# Altium PCB Power_Board.PcbDoc (part 2 of 3)
Units mil, origin at the board's own origin, x right, y up, seen from the top; angles counter-clockwise.
Board outline 5980 x 2140 mil, 4 copper layers (Top Layer, Layer 1, Layer 2, Bottom Layer), stack 23.756 mil thick; 228 components, 110 nets, 609 pads, 397 vias.
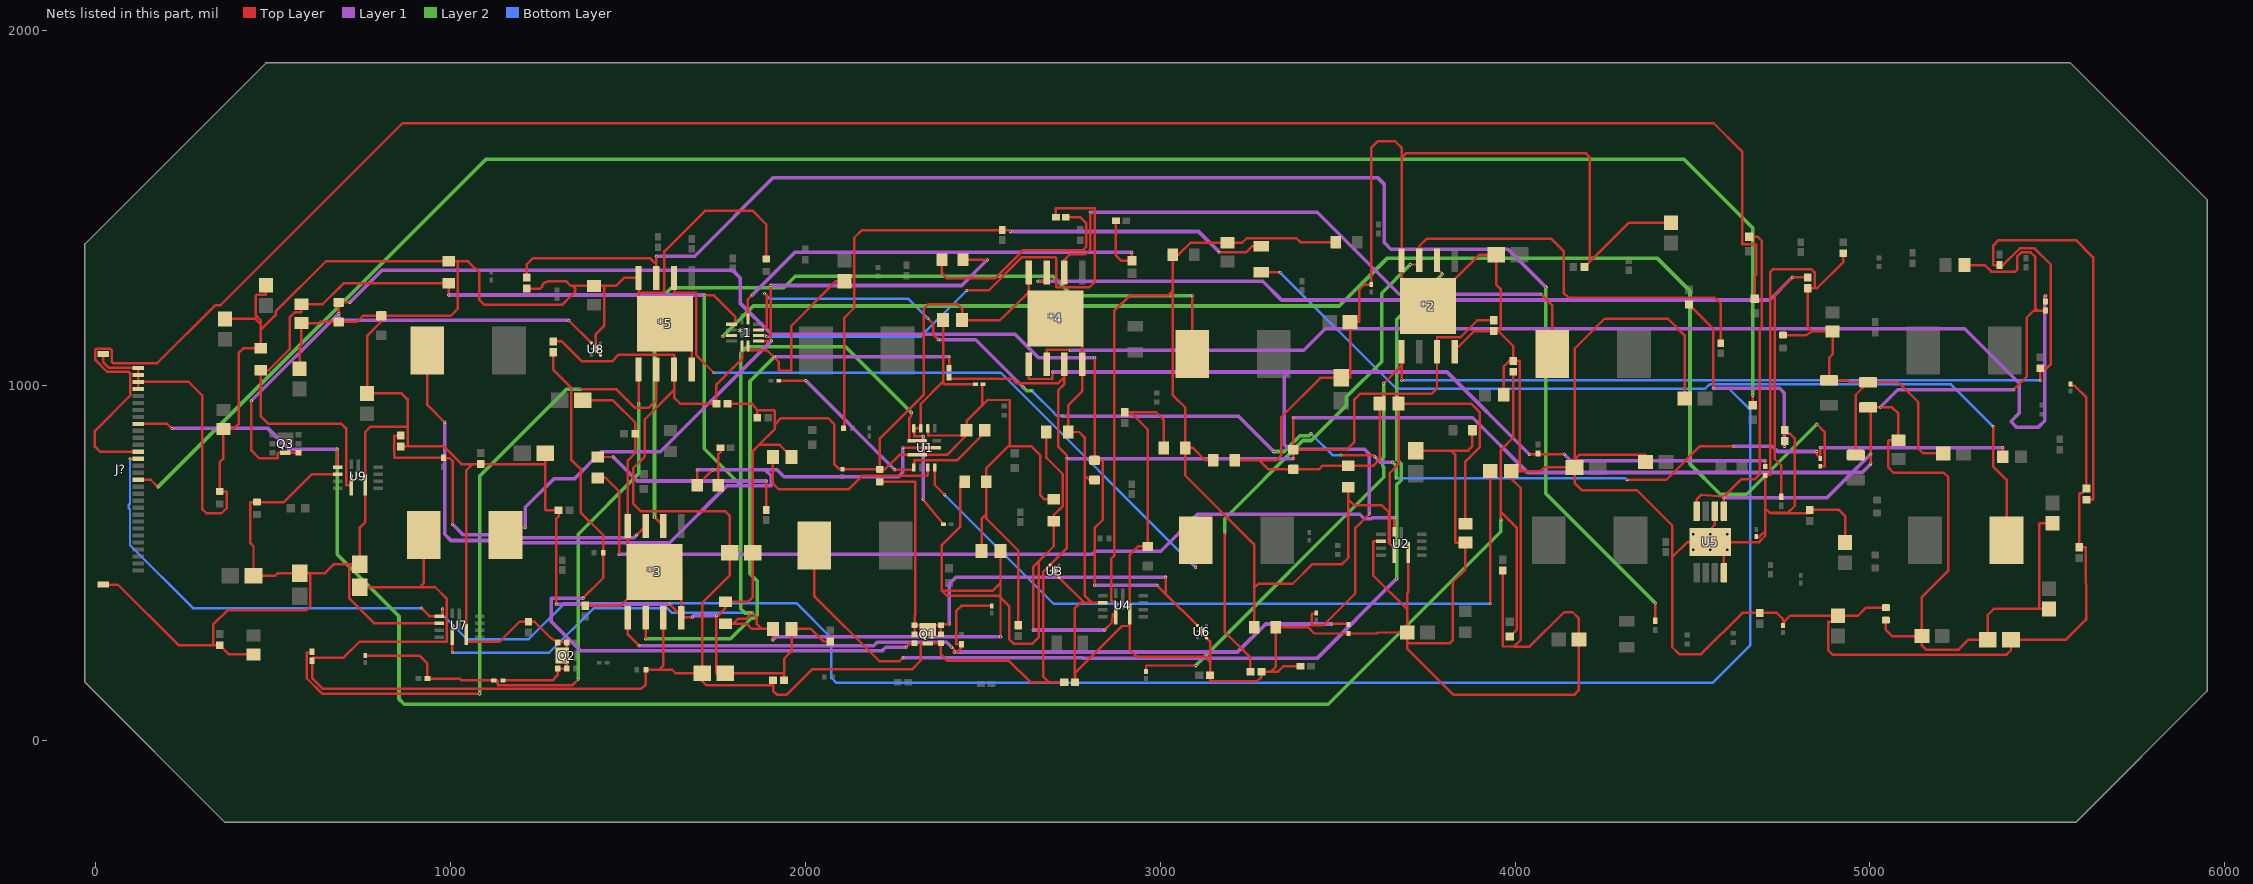
[diagram p4: the nets of this part, all layers, seen from the top]

## Part data (continued)
Q1 Q2 Q3: library part CMP-029-000000-1, "P-Channel 30V 10A (Ta) 1.25W (Ta) Surface Mount 6-UDFNB (2x2)", Package=None, Availability=Unavailable, Component Type=Standard, Design Item ID=SSM6J507NU,LF(T, MP=SSM6J507NU,LF(T, Pin Count=8, Price=None, Source=SSM6J507NU,LF(T.SchLib
R1: library part CMP-26527-001323-1, "4.7kΩ ±5% 0.05W 0201 Thick Film Chip Resistor AEC-Q200 compliant", Case Code (Imperial)=0201, Case Code (Metric)=0603, Max Operating Temperature=125°C, Max Power Dissipation=50mW, Min Operating Temperature=-55°C, Package Quantity=1, Resistance=4.7kR, Resistor Type="Thick Film", Temperature Coefficient=200ppm/°C, Tolerance=5%, Case/Package=0201, Contact Plating=Tin, Height=0.009inch, Lead Free="Lead Free", Length=0.024inch, Mount="Surface Mount", Number of Terminations=2, Packaging="Tape and Reel", Radiation Hardening=No, RoHS Compliant=Yes, Series=RMCF, Width=0.012inch
R2 R3 R10: library part CMP-2004-03564-1, Manufacturer="TE Connectivity / AMP", Part Number=CRG0201F100K
R4 R9 R14 R33 R51 R69: library part CMP-26527-006332-1, "3.3Ω ±5% 0.05W 0201 Thick Film Chip Resistor AEC-Q200 compliant", Case/Package=0201, Max Operating Temperature=125°C, Max Power Dissipation=50mW, Min Operating Temperature=-55°C, Resistance=3.3R, Resistor Type="Thick Film", Temperature Coefficient=400ppm/°C, Tolerance=5%, Contact Plating=Tin, Height=0.009inch, Length=0.024inch, Mount="Surface Mount", Number of Terminations=2, Packaging="Tape and Reel", Radiation Hardening=No, RoHS Compliant=Yes, Series=RMCF, Width=0.012inch
R5: library part CMP-26527-004787-1, "47kΩ ±5% 0.05W 0201 Thick Film Chip Resistor AEC-Q200 compliant", Case Code (Imperial)=0201, Case Code (Metric)=0603, Max Operating Temperature=125°C, Max Power Dissipation=50mW, Min Operating Temperature=-55°C, Package Quantity=10000, Resistance=47kR, Resistor Type="Thick Film", Temperature Coefficient=200ppm/°C, Tolerance=5%, Case/Package=0201, Contact Plating=Tin, Height=0.009inch, Length=0.024inch, Mount="Surface Mount", Number of Terminations=2, Packaging="Tape and Reel", Power Rating=50mW, Radiation Hardening=No, RoHS Compliant=Yes, Series=RMCF, Width=0.012inch
R6: library part CMP-03412-006200-1, "RT0201 10KΩ 0.05W 50 ppm/°C 0.10%", Manufacturer=Yageo, Package=RT0201, Power Rating=0.05W, Resistance=10KΩ, Temperature="-55°C to +125°C", Temperature Coefficient="50 ppm/°C", Temperature Range High=+125°C, Temperature Range Low=-55°C, Tolerance=0.001, Voltage Rating=25V, Automotive=No, Category=Res, ComponentLink2Description=Datasheet, ComponentLink2URL=http://www.yageo.com/documents/recent/PYu-RT_1-to-0.01_RoHS_L_9.pdf, Composition="Thin Film", Device Class L1="Passive Components", Device Class L2=Resistors, Device Class L3="Chip SMD Resistors", Footprint Url=http://www.yageo.com/exep/pages/download/literatures/PYu-R_Mount_10.pdf, Height=0.26mm, Ipc Land Pattern Name=RESC6030X23, Lead Free=Yes, Manufacturer Part Number=RT0201BRE0710KL, Octopart=https://octopart.com/rt0201bre0710kl-yageo-87214258, RoHS=TRUE, Series=RT
R7: library part CMP-2004-03891-1, Manufacturer="TE Connectivity / AMP", Part Number=CPF0201D1K0E1
R8: library part CMP-2004-02508-1, Manufacturer=Multicomp, Part Number=MCRE000140
R11 R13 R30 R32 R46 R47 R48 R50 R66 R68: library part CMP-2002-00308-2, "RES Thick Film, 1.21Ω, 1%, 0.063W, 100ppm/°C, 0402", Case Code (Imperial)=0402, Case Code (Metric)=1005, Max Operating Temperature=155°C, Max Power Dissipation=63mW, Min Operating Temperature=-55°C, Package Quantity=10, Resistance=1.21R, Temperature Coefficient=100ppm/°C, Tolerance=1%, Voltage Rating=50V, Case/Package=0402, Composition="Thick Film", Contact Plating=Tin, Features="Automotive AEC-Q200", Height=0.016inch, Lead Free="Lead Free", Length=0.039inch, Number of Terminations=2, Packaging="Tape and Reel", Power Rating=63mW, Radiation Hardening=No, Termination=SMD/SMT, Weight=2.3E-05oz, Width=0.5mm
R12 R31 R49 R67: library part CMP-26527-005560-1, "5.6kΩ ±5% 0.05W 0201 Thick Film Chip Resistor AEC-Q200 compliant", Case Code (Imperial)=0201, Case Code (Metric)=0603, Max Operating Temperature=125°C, Max Power Dissipation=50mW, Min Operating Temperature=-55°C, Resistance=5.6kR, Resistor Type="Thick Film", Temperature Coefficient=200ppm/°C, Tolerance=5%, Case/Package=0201, Contact Plating=Tin, Height=0.009inch, Length=0.024inch, Mount="Surface Mount", Number of Terminations=2, Packaging="Tape and Reel", Radiation Hardening=No, RoHS Compliant=Yes, Series=RMCF, Width=0.012inch
R15 R34 R52 R70: library part CMP-2004-00692-1, Manufacturer="Vishay Dale", Part Number=CRCW020151K0FNED
R16 R35 R53 R65 R71: library part CMP-009-00210-1, "Fixed Resistor, Thin Film, 0.05W, 10000ohm, 25V, 0.1% +/-Tol, 50ppm/Cel, Surface Mount, 0201", Case/Package=0201, Max Operating Temperature=125°C, Min Operating Temperature=-55°C, Tolerance=0.1%, Voltage Rating=25V, Mounting Technology="Surface Mount"
R17 R36 R54 R72: library part CMP-03412-049532-1, "Anti-Sulfurated Chip Resistors Automotive Grade 499kΩ 1% 200ppm/°C 0201", Case/Package=0201, Max Operating Temperature=125°C, Max Power Dissipation=50mW, Min Operating Temperature=-55°C, Resistance=499kR, Resistor Type="Thick Film", Temperature Coefficient=200ppm/°C, Tolerance=1%, Features="Moisture Resistant", Height=0.01inch, Length=0.024inch, Number of Terminations=2, Packaging="Tape and Reel", RoHS Compliant=Yes, Series=AF, Width=0.012inch
R18 R37 R55 R73: library part CMP-2004-00746-1, Manufacturer="Vishay Dale", Part Number=CRCW02015K60JNED
R19 R38 R56 R74: library part CMP-2004-00695-1, Manufacturer="Vishay Dale", Part Number=CRCW020151K1FNED
R20 R39 R57 R75: library part CMP-03412-047469-1, "Anti-Sulfurated Chip Resistors Automotive Grade 499Ω 1% 200ppm/°C 0201", Case/Package=0201, Max Operating Temperature=125°C, Max Power Dissipation=50mW, Min Operating Temperature=-55°C, Resistance=499R, Resistor Type="Thick Film", Temperature Coefficient=200ppm/°C, Tolerance=1%, Features="Moisture Resistant", Height=0.01inch, Length=0.024inch, Number of Terminations=2, Packaging="Tape and Reel", RoHS Compliant=Yes, Series=AF, Width=0.012inch
R21 R40 R58 R76: library part CMP-1010-00694-1, "300K 0.05W 1% 0201 (0603 Metric)  SMD", Case-EIA=0201, Case-Metric=0603, Power="0.05 W", Tolerance="1 %", Technology=SMT
R22 R41 R59 R77: library part CMP-2004-00140-1, Manufacturer="Vishay Dale", Part Number=CRCW0201160KFNED
R23 R42 R60 R78: library part CMP-1010-00656-1, "137K 0.05W 1% 0201 (0603 Metric)  SMD", Case-EIA=0201, Case-Metric=0603, Power="0.05 W", Tolerance="1 %", Technology=SMT
R24: library part CMP-009-00217-1, "CRCW FIXED RESISTOR 0201 (0603Metric) Chip Resistor ±1% ±100ppm/C 137kOhm 0.05W 1/20W", Case/Package=0201, Max Operating Temperature=155°C, Min Operating Temperature=-55°C, Tolerance=1%, Voltage Rating=30V, Mounting Technology="Surface Mount"
R25: library part CMP-009-00221-1, "50mW Thick Film Resistors 25V ±1% ±200ppm/℃ 300kΩ 0201 Chip Resistor - Surface Mount ROHS", Case/Package=0201, Max Operating Temperature=125°C, Min Operating Temperature=-55°C, Tolerance=1%, Voltage Rating=25V, Mounting Technology="Surface Mount"
R26 R43: library part CMP-009-00222-1, "CRCW Series 0201 160 kOhm ±1% 0.05 W ±200 ppm/K Thick Film Chip Resistor", Case/Package=0201, Max Operating Temperature=155°C, Min Operating Temperature=-55°C, Tolerance=1%, Voltage Rating=30V, Mounting Technology="Surface Mount"
R27: library part CMP-009-00224-1, "0201 51.1K ohms 1% 200PPM thick film surface mount chip resistor", Case/Package=0201, Max Operating Temperature=155°C, Min Operating Temperature=-55°C, Tolerance=1%, Voltage Rating=30V, Mounting Technology="Surface Mount"
R28 R29 R45: library part CMP-009-00207-1, "Res Thick Film 0201 4.7K Ohm 5% 0.05W(1/20W) ±200ppm/C Pad SMD Automotive T/R", Case/Package=0201, Max Operating Temperature=155°C, Min Operating Temperature=-55°C, Tolerance=5%, Voltage Rating=25V, Mounting Technology="Surface Mount"
R44: library part CMP-009-00163-3, "Chip Resistor, 200 kOhms, +/-1 %, 63 mW, -55 to 155 degC, 0402", Case/Package=0402, Max Operating Temperature=155°C, Min Operating Temperature=-55°C, Power=63mW, Tolerance=1%, Pins=2
R61 R79 R83: library part CMP-13261-004037-1, "Res Thick Film 0201 120kΩ 1% 0.05W ±250ppm/°C Molded SMD T/R", Case Code (Imperial)=0201, Case Code (Metric)=0603, Max Operating Temperature=125°C, Max Power Dissipation=50mW, Min Operating Temperature=-55°C, Resistance=120kR, Temperature Coefficient=250ppm/°C, Tolerance=1%, Voltage Rating (DC)=25V, Case/Package=0201, Composition="Thick Film", Contact Plating=Tin, Features="Moisture Resistant", Height=0.01inch, Lead Free="Lead Free", Length=0.024inch, Number of Terminations=2, Packaging="Tape and Reel", Radiation Hardening=No, Width=0.012inch
R62 R63 R80 R81 R84 R85: library part CMP-009-00205-1, "Res General Purpose Thick Film 0201 100k Ohm 1% 1/20W ±200ppm/°C Molded Paper T/R", Case/Package=0201, Max Operating Temperature=155°C, Min Operating Temperature=-55°C, Tolerance=1%, Voltage Rating=25V, Mounting Technology="Surface Mount"
R64 R82 R86: library part CMP-009-00208-1, "Res General Purpose Thick Film 0201 1k Ohm 1% 1/20W ±200ppm/°C Molded Paper T/R", Case/Package=0201, Max Operating Temperature=125°C, Min Operating Temperature=-55°C, Tolerance=1%, Voltage Rating=25V
U1: library part CMP-019-00053-1, "Step-Down (Buck) Synchronous (1), Linear (LDO) (1) QFN-12", Max Operating Temperature=125°C, Max Supply Voltage=24V, Min Operating Temperature=-40°C
U2 U4 U7 U9: library part CMP-006-000002-1, "26V 6A Low IQ High-Current Synchronous Step-Down Converter", Manufacturer_Name="Monolithic Power Systems", Copyright="Copyright (C) 2025 Ultra Librarian. All rights reserved.", Design Item ID=MP8756GD-Z, Manufacturer_Part_Number=MP8756GD-Z, RefDes=RefDes, Source=MP8756GD-Z.SchLib, Type=Type
U3 U6 U8: library part CMP-07128-000002-1, "IC REG LINEAR 1.2V 500MA 4XDFN", Dropout Voltage=295mV, Manufacturer="ON Semiconductor", Max Junction Temp=+150°C, Max Supply Voltage=5.5V, Min Supply Voltage=1.6V, Nominal Supply Current=60uA, Output Current=500mA, Output Voltage=1.2V, Package=711AJ, Temperature="to +150°C", Accuracy Percentage=1.2%, Automotive=No, Category=IC, ComponentLink2Description=Datasheet, ComponentLink2URL=https://www.onsemi.com/pub/Collateral/NCP177-D.PDF, Device Class L1="Integrated Circuits (ICs)", Device Class L2="Power Management ICs", Device Class L3="Voltage Regulators - Linear", Digikey Description="IC REG LINEAR 1.2V 500MA 4XDFN", Footprint Url=https://www.onsemi.com/pub/Collateral/711AJ.PDF, Height=0.43mm, Lead Free=Yes, Manufacturer Part Number=NCP177AMX120TCG, Mouser Description="LDO Voltage Regulators FAST TRANSIENT RESPO", Number Of Outputs=1, Octopart=https://octopart.com/ncp177amx120tcg-on+semiconductor-67320276, Output Type=Fixed, RoHS=TRUE, Standoff Height=0mm, Temperature Range High=+150°C
U5: library part CMP-00370-110083557-1, "TLV76701DGNR Adjustable- and fixed-output, 1-A, 16-V, positive-voltage low-dropout (LDO) linear regulator 8-HVSSOP -40 to 125", Dropout Voltage=900mV, Manufacturer Lifecycle Status=ACTIVE, Max Junction Temperature (Tj)=125°C, Max Supply Voltage=16V, Min Operating Temperature=-40°C, Min Supply Voltage=2.5V, Nominal Supply Current=1.5mA, Output Current=1A, Accuracy=0.5%, Height=1.1mm, Length=3mm, Lifecycle Status=Production, Max Operating Temperature=125°C, NexarPartId=110083557, Number Of Channels=1, Number Of Outputs=1, Number of Pins=8, Thickness=1.02mm, Width=3mm

## Via types
v1: diameter 7.87, hole 3.94, Top Layer to Layer 1, 260 vias
v2: diameter 7.87, hole 3.94, Top Layer to Bottom Layer, 100 vias
v3: diameter 7.87, hole 3.94, Layer 2 to Bottom Layer, 17 vias
v4: diameter 7.87, hole 3.94, Layer 1 to Layer 2, 14 vias
v5: diameter 19.68, hole 7.87, Top Layer to Bottom Layer, 6 vias

## Nets (pads, with @x,y where several pads share a name; then routed paths per layer and width w, separated by ;. In a path a pad name is that pad's centre, name@x,y a point inside that pad or via, vN(x,y) a via of type N, cw(c..) or ccw(c..) an arc to the next point about the centre after c; other vN are vias at no path point)
CPUA_MODE: C72.1 J?.17 R50.1 U7.9 | length 6657.8
  Top Layer w7: v1(97,794.53) J?.17@120.28,794.53 ; v1(918,374) 940.82,351.18 U7.9@968.23,351.18 978,351.18 v1(978,372) ; R50.1@4490,1229.33 4559,1160.33 v1(4559,993) ; v1(4759,829.21) 4759.17,829.37 4759.17,843.81 C72.1@4760,844.65
  Layer 1 w10: v1(4559,993) 4746,993 4759,980 v1(4759,829.21)
  Bottom Layer w7: v1(97,794.53) 97,668.09 93.63,664.71 93.63,655.29 97,651.91 97,551 274,374 v1(918,374) ; v1(978,372) 978,355 1047,286 1220,286 1321,387 1976,387 2073,290 2073,177.5 2087.5,163 4556,163 4663,270 4663,932 4602,993 v1(4559,993)
  other v2: 4559,993
CPUB_MODE: C93.1 J?.22 R68.1 U9.9 | length 5574.8
  Top Layer w7: J?.22@120.28,892.95 202.1,892.95 v1(215.05,880) ; v2(681,822) 681,771.18 U9.9@682.6,771.18 ; v1(3960,623) 3960,645 ; R68.1@3985,293.66 4005,313.66 4005,600 3960,645 ; C93.1@3995,1039.65 3995,854 3960,819 3960,645
  Layer 1 w10: v1(215.05,880) 486,880 544,822 v2(681,822)
  Layer 2 w10: v2(681,822) 681,525 855,351 855,117.5 869.5,103 3474,103 3960,589 v1(3960,623)
  other v1: 681,822
GND: *2.4 *2.8 *2.9 *3.4 *3.8 *3.9 *4.4 *4.8 *4.9 *5.4 *5.8 *5.9 C1.2 C2.1 C3.2 C4.1 C5.2 C6.2 C8.2 C9.1 C10.2 C11.2 C13.2 C26.2 C27.1 C28.2 C30.2 C31.2 C33.1 C34.2 C35.2 C36.2 C37.2 C38.2 C40.2 C41.1 C42.2 C43.2 C44.1 C45.1 C46.1 C47.2 C48.2 C49.2 C50.1 C51.2 C53.2 C54.2 C56.1 C57.2 C58.2 C59.2 C60.2 C61.2 C62.2 C63.2 C65.1 C66.2 C67.2 C68.2 C69.1 C70.2 C72.2 C73.2 C75.1 C76.2 C77.2 C78.2 C79.2 C81.2 C82.1 C83.2 C84.2 C85.1 C86.1 C87.1 C88.2 C89.2 C90.1 C91.2 C93.2 C94.2 C96.1 C97.2 C98.2 C99.2 C100.2 C102.2 C103.1 C104.2 C105.2 C106.1 C107.1 C109.2 C110.1 C111.2 C112.2 C113.1 C114.1 J?.27 J?.28 J?.29 J?.30 J?.31 J?.32 Q2.1 Q2.2 Q2.5 Q2.6 Q2.7 R2.2 R16.2 R23.1 R24.2 R35.2 R42.1 R43.2 R53.2 R60.1 R61.1 R65.1 R71.2 R78.1 R79.1 R83.1 U1.2 U1.10 U2.2 U2.10 U3.2 U3.5 U4.2 U4.10 U5.4 U5.6 U5.9 U6.2 U6.5 U7.2 U7.10 U8.2 U8.5 U9.2 U9.10 | length 35843.5
  Top Layer w7: J?.31@21.85,440.2 62.5,440.2 233.44,269.25 332,269.25 ; J?.32@21.85,1089.8 21,1089.8 21,1066.93 37.5,1050.43 J?.30@120.28,1050.43 J?.29@120.28,1030.75 J?.28@120.28,1011.06 ; J?.27@120.28,991.38 J?.28@120.28,1011.06 ; C77.2@365,1188.56 450,1188.56 465,1173.56 ; C56.1@445,243.43 375.83,243.43 R60.1@350,269.25 332,269.25 ; C78.2@480,1283.56 480,1258 479,1257 455,1257 452,1254 452,1198 465,1185 465,1173.56 ; C57.2@575,1048.56 575,1110 580,1115 C69.1@580,1176.85 630,1176.85 633.15,1180 C87.1@685,1180 736,1180 753.56,1197.56 C88.2@805,1197.56 ; U9.10@682.6,751.5 609.5,751.5 530.72,672.72 C100.2@455,672.72 437,672.72 436,671.72 436,557 445,548 C43.2@445,465 506,465 513.5,472.5 C42.2@575,472.5 ; C86.1@860,829.29 878,829.29 ; U7.10@968.23,331.5 784.5,331.5 715,401 715,496 C109.2@745,497.5 ; R83.1@1147.8,170 1287.5,170 1302.2,184.7 Q2.1@1302.2,203.09 Q2.2@1327.8,203.09 1327.8,215 1315,227.8 Q2.7@1315,240 1315,252 1327.8,264.8 Q2.5@1327.8,276.91 Q2.6@1302.2,276.91 1283.59,288.76 1237,335.35 C30.2@1220,335.35 1194.85,335.35 1138.5,279 1045,279 U7.2@1045,300 1045,762.15 1062.5,779.65 ; C114.1@1215,1274.29 1253.76,1274.29 1258.63,1279.16 1258.63,1284.71 1265.29,1291.37 1270.84,1291.37 1274.73,1295.27 1325.27,1295.27 1338.96,1281.57 1343.89,1281.57 ; C84.2@1267.5,810 1267.5,781 ; v1(1298,385) 1298,625 1305,632 1305,650 C54.2@1304.65,650 1268.5,650 1267.5,651 1267.5,781 ; C83.2@1372.5,960 1457,960 1520.75,896.25 R42.1@1520.75,865 1520.75,810.75 1500,790 *3.8@1500,605 1500,550.87 *3.9@1575,475.87 ; C31.2@1380,380.35 1479.49,380.35 *3.9@1575,475.87 ; U8.2@1422.8,1086.5 1410,1099.29 U8.5@1410,1105 1410,1146 1433,1169 1433,1280.57 1432,1281.57 ; v1(1617,385) *3.4@1650,352 ; *3.4@1650,346.73 *3.4@1650,352 ; *5.4@1680,1045.87 1680,1175 *5.9@1605,1175 1530,1175 1530,1264 ; v2(1682,348.63) 1653.37,348.63 *3.4@1650,352 ; v1(1750,352) v1@1753,352 ; C82.1@1780.35,950 1850,950 1864.65,931 ; C53.2@1864.65,910 1864.65,930 1864.65,931 ; C61.2@1890,1357.72 1890,1455 1852,1493 1717,1493 1603,1379 1603,1264 1602,1263 1531,1263 1530,1264 ; C41.1@1940,170 1940,189 ; C6.2@1961.57,800 1927.57,834 1869.5,834 ; C106.1@2070,279.65 2051.35,279.65 2016,315 C50.1@1961.57,315 1961.57,252.57 1940,231 1940,189 ; U1.10@2345,880.24 2346,859 C4.1@2454.41,860.84 ; C2.1@2496.85,535 2496.85,625 2510.51,638.66 ; R2.2@2500.83,1005 2498,1005 2498,944.59 ; C67.2@2600,325.35 2600,536 2510.51,625.49 2510.51,638.66 ; *4.8@2630,1319.13 *4.9@2630,1265 ; C49.2@2700,680 2674,680 2661.5,692.5 2661.5,805 2636.5,830 2576,830 ; U3.5@2702.2,479.06 2702.2,473.35 U3.2@2715,460.55 2787.36,388.19 ; C65.1@2815,735 2800,735 2787,748 ; U4.10@2837.91,388.19 2808,388.19 ; C48.2@2900,925.71 2916.29,925.71 ; C28.2@3009.49,825 3009.49,905 2988.78,925.71 2916.29,925.71 ; U6.5@3117.8,308.5 3117.8,302.79 U6.2@3130.59,290 3140.71,279.88 3140.71,221.29 ; C91.2@3210.51,790 3280,790 ; R43.2@3395.24,210 3347,210 3332,195 3312.5,195 ; C27.1@3618.43,950 3618.43,792.5 3601.44,775.51 C89.2@3530,775.51 3457.63,775.51 3447,764.88 C46.1@3375,764.88 3305.12,764.88 3280,790 ; U2.10@3622.6,561.5 3602,561.5 3601,560.5 3601,465 3696.44,369.56 ; U2.2@3699.37,530 3699.37,418.93 3696.44,416 3696.44,369.56 ; C112.2@3720,817.5 3819.5,817.5 ; *2.4@3830,1095.87 3830,1112 3842.71,1112 3885,1154.29 C110.1@3940,1154.29 3952.71,1154.29 ; C47.2@3880,875 3880,830 3867.5,817.5 3819.5,817.5 ; C113.1@3965,479.29 3965,266 3997,265 ; C9.1@3968.15,975 3968.15,1055 3983.5,1070.35 C93.2@3995,1070.35 ; R23.1@4195.75,1335 4211,1350.25 ; C34.2@4367.88,785 4367.88,805 4367.38,805.5 4180.5,805.5 4167.5,792.5 ; C76.2@4440,1460 4320.75,1460 4211,1350.25 ; C36.2@4477.88,965 4477.88,1142.12 4431,1189 4252,1189 4167.5,1104.5 4167.5,792.5 ; U5.6@4562.8,646.61 4562.8,608.8 4550,596 v5(4550,581.65) U5.9@4550,560 ; U5.4@4588.39,473.39 4588.39,533 4550,533 v5(4550,538.35) U5.9@4550,560 ; R65.1@4680,574.99 4680,574 4687.5,574 4705,591.5 ; R53.2@4755,325 4755,332.12 ; C37.2@4755,1142.72 4819,1142.72 4837.5,1153.43 ; C72.2@4760,875.35 4760,865 4775,865 4788,852 4788,662 4768,642 4718,642 ; R78.1@4925,1373.5 4925,1349 4851,1275 4843,1275 ; C99.2@4930,558.56 4930,632.85 4912.5,650.35 C73.2@4830,650.35 4830,641 4768,641 4719,641 4718,642 ; C60.2@4960,805.04 4960,975.04 C62.2@4995,1010.04 ; C63.2@5045,375 4988.88,375 4966,352.12 C98.2@4910,352.12 ; C97.2@5206.44,810 5150,810 5136,824 5136,954.04 5080,1010.04 C62.2@4995,1010.04 ; R71.2@5565,1005.01 5565,1000 5577,1000 5610,967 R24.2@5610,710.75 5596.25,697 5591,697 5590,696 C38.2@5590,545.35 5608,545.35 5609,341.5 5552.5,285 C102.2@5397.5,285 5397.5,255 5385,242.5 4894.5,242.5 4882,255 4882,334 4883,335 4910,335 C98.2@4910,352.12 ; J?.28@120.28,1011.06 262.5,1011.06 300,973.56 300,653.5 312.5,641 355,641 369,655 369,701.72 C79.2@350,702.72 350,785 360,795 C75.1@360,878.43 388.93,878.43 403,892.5 403,1092.5 416.01,1105.51 C70.2@465,1105.51 465,1157.23 ; 332,269.25 331,327 371.5,367.5 592.5,367.5 605,380 605,471.5 C42.2@575,472.5 ; 465,1157.23 465,1173.56 ; 465,1157.23 507.25,1199.47 507.25,1209.18 648.57,1350.51 C68.2@995,1350.51 1020,1350.51 ; C42.2@575,472.5 647,472.5 672,497.5 C109.2@745,497.5 ; C109.2@745,497.5 745,601 759.37,615.37 U9.2@759.37,720 759.37,869.37 775,885 879,885 ; C88.2@805,1197.56 805,1181 765,1141 C58.2@765,978.56 862.5,978.56 879,962.06 879,885 ; C88.2@805,1197.56 1001.06,1197.56 1021,1217.5 1021,1349.51 1020,1350.51 ; 878,829.29 981.35,829.29 1031,779.65 1062.5,779.65 ; 878,829.29 879,830.29 879,885 ; 1020,1350.51 1050,1350.51 1081.5,1319.01 1081.5,1242.5 1096,1228 1314,1228 1344.63,1258.63 1344.71,1258.63 1351.37,1265.29 1351.37,1274.71 1344.51,1281.57 1343.89,1281.57 ; 1062.5,779.65 C85.1@1085,779.65 1266.15,779.65 1267.5,781 ; 1343.89,1281.57 C33.1@1405,1281.57 1432,1281.57 ; 1432,1281.57 1466.94,1281.57 1489.5,1304.13 *5.8@1530,1304.13 1530,1264 ; *3.9@1575,475.87 1650,475.87 *3.4@1650,352 ; v1@1753,352 1753.5,352 1775,373.5 1775,374 ; v1@1753,352 1775,374 ; v1@1753,352 1749,348 1749,191 1750,190 C40.2@1775,190 1939,190 1940,189 ; 1775,374 C26.2@1775,391.02 1838.52,391.02 1852.5,405 C81.2@1852.5,530 1852.5,817 1869.5,834 ; 1864.65,931 1913,931 1914,930 1914,891.5 ; 1869.5,834 1914,878.5 1914,891.5 ; 1914,891.5 1931.5,909 2064.5,909 2081,892.5 2081,780 2094,767 2105,767 R16.2@2105,765.01 2157,765.01 C13.2@2210,765 ; C13.2@2210,765 2210,852 2334,976 2334,1217.5 2346.5,1230 2429.07,1230 2441.57,1217.5 C5.2@2441.57,1185 2548.5,1185 *4.9@2630,1265 ; C13.2@2210,765 2224.57,765 2265,805.43 U1.2@2315.47,805.43 2399,805.43 C4.1@2454.41,860.84 ; C4.1@2454.41,860.84 C4.1@2454.41,875 2454.41,901 2498,944.59 ; 2498,944.59 2514.41,961 2576,960 2576,830 ; 2510.51,638.66 C3.2@2510.51,730 2510.51,768.01 2572.5,830 2576,830 ; *4.9@2630,1265 *4.9@2705,1190 2780,1115 *4.4@2780,1060.87 2780,984.49 2740.51,945 C1.2@2740.51,870 2772,870 2787,855 2787,748 ; 2787,748 2787,409.19 2808,388.19 ; 2787.36,388.19 2775,388.19 2759,372.19 2759,191 2759,165 C103.1@2760.35,165 2760.35,191 2892.35,323 2914.69,324 ; 2787.36,388.19 2808,388.19 ; 2914.69,324 U4.2@2914.69,356.69 2914.69,524.75 2937.5,547.56 C66.2@2965,547.56 2965,877 2916.29,925.71 ; 2914.69,324 2914.69,255 2932.69,237 3125,237 3140.71,221.29 ; 3140.71,221.29 C44.1@3140.71,185 3140.71,167.29 3141,167 3272,167 3285,180 C45.1@3285,195 3312.5,195 ; 3280,790 3326,790 3341,805 3341,912 3451.5,1022.5 C111.2@3510,1022.5 3535,1023.5 C10.2@3535,1180 3560,1180 3561,1181 3561,1271 3575,1285 R35.2@3595,1285.01 3595,1671.5 3612.5,1689 3662.5,1689 3680,1671.5 3680,1642.5 ; 3312.5,195 3325.51,208.01 C51.2@3325.51,320 3416.45,320 3434.25,302.2 R61.1@3530,302.2 3611,302.2 3613.8,305 C35.2@3696.44,305 ; 3680,1642.5 *2.8@3680,1354.13 3680,1225 *2.9@3755,1225 3900,1370 C105.2@3947.5,1370 3947.5,1284.5 3959,1273 3959,1160.58 3952.71,1154.29 ; 3680,1642.5 3692.5,1655 4200,1655 4211,1644 4211,1350.25 ; 3696.44,275.62 3696.44,259 3825.44,130 4167.5,130 4180,142.5 C11.2@4180,285 4180,344.5 4162.5,362 4138,362 4041,265 3997,265 ; 3696.44,275.62 3698,274.06 3815.06,274.06 3825,284 3825,448 3860,483 C90.1@3860,558.43 3833,558.43 3832,559.43 3832,805 3819.5,817.5 ; 3696.44,275.62 C35.2@3696.44,305 ; C35.2@3696.44,305 3696.44,369.56 ; 3952.71,1154.29 3995,1112 C93.2@3995,1070.35 ; C93.2@3995,1070.35 4012,1070.35 4013,1069.35 4013,761 4012,760 ; 3997,265 4016,284 4016,712.06 3989.06,739 C8.2@3989.06,760 4012,760 ; 4012,760 4073,760 4083,770 C104.2@4167.5,770 ; C104.2@4167.5,770 4167.5,726 4187.5,706 4343,706 4443,606 4443,517.5 ; C104.2@4167.5,770 4167.5,792.5 ; 4443,517.5 4443,263.5 4462.5,244 4524,244 4640.35,360.35 C94.2@4690,360.35 4737.5,360.35 4755,342.85 4755,332.12 ; 4443,517.5 4485.5,560 U5.9@4550,560 ; U5.9@4550,560 4687.5,560 4705,577.5 4705,591.5 ; 4705,591.5 4705,655 ; 4705,655 4718,642 ; 4705,655 R79.1@4705,747.2 4705,749 4718,749 4719,750 4719,1320.5 4726.5,1328 4836,1328 4844,1320 4844,1276 4843,1275 ; 4755,332.12 4775,352.12 C98.2@4910,352.12 ; 4837.5,1153.43 4825,1165.93 C107.1@4825,1275 4843,1275 ; 4837.5,1153.43 C96.1@4895,1153.43 4895,1089 4885,1079 C59.2@4885,1015.47 4937,1015.47 4942.43,1010.04 C62.2@4995,1010.04
  Layer 1 w10: v1(1298,385) v1(1617,385) ; v2(1682,348.63) 1685.37,352 v1(1750,352)
  other v5: 4501.97,538.35 4598.03,538.35 4501.97,581.65 4598.03,581.65
GPIOD_7: J?.14 R48.2 | length 5520.6
  Top Layer w7: J?.14@120.28,735.47 155.53,735.47 v1(176,715) ; R48.2@4670,945.67 v1(4670,973)
  Layer 2 w10: v1(176,715) 1100,1639 4476,1639 4670,1445 v1(4670,973)
GPIOH_0: J?.18 R47.2 | length 5964.8
  Top Layer w7: J?.18@120.28,814.21 12.5,814.21 -2,828.71 -2,873 97.09,972.09 97.09,1035.4 92.99,1039.5 32.97,1039.5 -1.34,1073.8 -1.34,1100.76 3.02,1105.11 40.68,1105.11 45.04,1100.76 45.04,1067.88 49.14,1063.78 173.65,1063.78 337.58,1227.71 352.71,1227.71 865,1740 4560,1740 4635,1665 4635.9,1665 4640,1660.9 4640,1400 4641,1399 4678.25,1399 4679.25,1398 4679.25,1313.25 4675,1309 R47.2@4675,1245.67
Net*1_1: *1.1 C1.1 C2.2 C3.1 C14.1 C15.2 C16.1 C26.1 C27.2 C28.1 C49.1 C50.2 C51.1 C68.1 C69.2 C70.1 C89.1 C90.2 C91.1 U1.1 U2.1 U4.1 U7.1 U9.1 | length 12797.5
  Top Layer w7: U9.1@720,720 707,720 706,721 706,880 693,893 487.5,893 465,915.5 C70.1@465,1044.49 487.99,1044.49 546.66,1103.16 546.66,1192.5 561.16,1207 580,1208 C69.2@580,1230 640,1230 699.49,1289.49 C68.1@995,1289.49 v1(995,1256) ; v1(1005.63,248.37) U7.1@1005.63,300 ; v2(1715,1256) 1741.5,1256 1803,1194.5 1803,1173.62 *1.1@1791.81,1173.62 ; C26.1@1775,330 1797,330 ; v1(1908.43,284) C50.2@1908.43,315 1877,315 ; v2(2299,924) 2299,916 2293,910 2293,844.8 U1.1@2315.47,844.8 ; C3.1@2449.49,730 2437,730 2437,604 2385,552 2385,423 2386,422 ; v1(2550,293) 2550,403.5 ; C2.2@2550,535 2550,444 ; v1(2642,312) 2642,490 2658,506 ; C1.1@2679.49,870 2679.49,797.51 2726,751 2726,662 2700,636 C49.1@2700,618.98 2700,548 2658,506 ; v1(2843,312) 2865,334 2866,356.69 U4.1@2875.32,356.69 2874.32,392 2862,393 2862,513 2870,521 2870,1210.5 2914.5,1255 3022.5,1255 3035,1267.5 ; C91.1@3149.49,790 3127,790 3092,825 C28.1@3070.51,825 ; C51.1@3264.49,320 3264.49,430 ; C14.1@3494.49,1405 3395,1405 3384,1416 3243.85,1416 3231,1403.15 C15.2@3190,1403.15 3085.15,1403.15 3052,1370 C16.1@3035,1370 3035,1267.5 ; C89.1@3530,714.49 3530,680 ; U2.1@3660,530 3660,542 3647,555 ; C90.2@3860,611.57 3860,787 3901,828 3901,925 3876,950 C27.2@3671.57,950 3671.57,779.57 3647,755 3647,555 ; 1797,330 1811,344 1834,344 v1(1850,360) 1863.5,346.5 1863.5,328.5 1877,315 ; 1797,330 1834,330 1849,315 1877,315 ; 2386,422 2528,422 2550,444 ; 2386,422 2400,408 2545.5,408 2550,403.5 ; 2550,403.5 2550,444 ; 2550,403.5 2575,378.5 2575,285.5 2587.5,273 2638.5,273 2658,292.5 2658,506 ; 3035,1267.5 3035,974.51 3070.51,939 C28.1@3070.51,825 ; C28.1@3070.51,825 3070.51,747.49 3264.49,553.51 3264.49,430 ; 3264.49,430 3276.99,442.5 3373.5,442.5 3429,498 3512.5,498 3530,515.5 3530,680 ; 3530,680 3547,663 3625,663 3644,644 3644,558 3647,555
  Layer 1 w10: v1(995,1256) v2(1715,1256) ; v1(1908.43,284) 1917.43,293 v1(2550,293) ; v1(2642,312) v1(2843,312)
  Layer 2 w10: v2(1715,1256) 1715,823 1818,720 ; v1(1850,360) 1830,360 1818,372 1818,720 ; v2(2299,924) 2113,1110 1835.5,1110 1818,1092.5 1818,720
  Bottom Layer w7: v1(1005.63,248.37) 1278.37,248.37 1404,374 1609.88,374 1623.88,360 v1(1850,360)
  other v2: 1850,360
Net*1_3: *1.3 R10.1 | length 3980.2
  Top Layer w7: v1(1768,1140) 1771.87,1140 1774,1142.13 *1.3@1791.81,1142.13 ; v1(4850,892) 4873,869 4873,774.35 4872,773.35 R10.1@4860,773.35
  Layer 2 w10: v1(1768,1140) 1853,1225 3505,1225 3639,1359 4401.5,1359 4493,1267.5 4493,780 4578,695 4653,695 v1(4850,892)
Net*1_5: *1.5 *2.3 *3.3 *4.3 *5.3 C12.2 C20.2 C21.2 C22.1 C23.1 C24.1 C40.1 C41.2 C46.2 C62.1 C63.1 C81.1 C82.2 C102.1 C103.2 C109.1 C110.2 L2.1 Q1.4 Q1.8 R5.2 R46.2 R63.1 R81.1 R85.1 U3.4 U5.5 U5.8 | length 14618.9
  Top Layer w7: C109.1@745,432.5 912.5,432.5 ; L2.1@925,580 925,445 912.5,432.5 ; C12.2@1290,1125.35 1314,1125.35 1370.35,1069 1455,1069 1474,1088 1629,1088 1630,1087 *5.3@1630,1045.87 1630,988 ; *3.3@1600,346.73 1600,212.5 1587.5,200 ; *1.5@1822.13,1111.81 1822.13,1076 1749.65,1003.52 C82.2@1749.65,950 1647.5,950 1630,967.5 1630,988 ; R63.1@2405,1024.41 2405,1020 2582,1020 2595,1007 2712.5,1007 2730,1024.5 ; C103.2@2729.65,165 2686,165 ; *4.3@2730,1060.87 2730,1024.5 ; v1(3375,795) C46.2@3375,820 ; v1(3375,910) C46.2@3375,820 ; C110.2@3940,1185 3894,1185 3846,1137 3781,1137 3780,1136 *2.3@3780,1095.87 3780,992.5 3764.62,977.12 3562.5,977.12 3547,961.62 3547,842 3525,820 C46.2@3375,820 ; U5.8@4511.61,646.61 4511.61,680.07 4525,693.46 v1@4588.39,688 ; U5.5@4588.39,646.61 v1(4588.39,685) v1@4588.39,688 ; R46.2@4660,1420.67 4682.82,1420.67 4695,1408.49 4695,1166 4690,1161 4690,751.54 4675,736.54 4636.93,736.54 v1@4588.39,688 ; C62.1@4995,939.57 C62.1@5002,939.57 ; v1(5002,780) v1(5002,808) C62.1@5002,939.57 ; C63.1@5045,339.57 5045,312.5 5062.5,295 C22.1@5146.44,295 ; C21.2@5266.57,1340 5324,1340 5342,1322 5409.67,1322 5414.73,1327.07 5414.73,1364.06 5426.97,1376.3 5453.03,1376.3 5465.27,1364.06 5465.27,1219.06 5472.12,1212.2 ; v1(5405,989) 5442,1026 5442,1192.5 5461.7,1212.2 5472.12,1212.2 ; R81.1@5495,1212.2 5472.12,1212.2 ; C23.1@5505,371.44 5478,371.44 ; C24.1@5515,612.88 5478,612.88 5477,611.88 5477,372.44 5478,371.44 ; 912.5,432.5 957.05,432.5 990,399.55 990,280 989,279 744,279 699,234 610,234 R85.1@610,225 610,177 641.09,145.91 1537.5,145.91 1550.59,159 R5.2@1550.59,200 1587.5,200 ; 1587.5,200 1625,200 1635,190 C40.1@1710,190 ; 1630,988 1548,906 1548,801 1514.81,767.81 1514.81,668.69 1537.5,646 1775,646 1787.5,633.5 C81.1@1787.5,530 1787.5,467 1710,389.5 C40.1@1710,190 ; C40.1@1710,190 1710,167.5 1720.5,157 1908.29,157 C41.2@1909.29,170 1909.29,140.71 1920,130 1948,130 2019.19,201.19 2300.69,201.19 2325,225.5 2325,273.41 2326,274.41 Q1.8@2345,274.41 Q1.4@2381.91,274.41 2381.91,242.5 2398.41,226 2573,226 2634,165 2686,165 ; 2686,165 2670,181 2670,475.59 U3.4@2689.41,495 2737,542.59 v1(2737,795) 2737,804 2713,828 2713,988 2730,1005 2730,1024.5 ; C62.1@5002,939.57 v1(5029,939.57) 5062.5,939.57 5080,922.07 C20.2@5080,846.57 5053,846.57 5052,845.57 5052,770 5067,755 5208.5,755 5221,742.5 5221,479.56 5146.44,405 C22.1@5146.44,295 ; C22.1@5146.44,295 5146.44,268 5157.62,256.82 5250,256.82 5278.18,285 C102.1@5332.5,285 5332.5,355 5348.94,371.44 5478,371.44
  Layer 1 w10: v1(2737,795) v1(3375,795) ; v1(3375,910) 3881,910 4035.12,755.88 4949.88,755.88 ; v1(4588.39,685) 4879,685 4949.88,755.88 ; v1(5002,780) 4977.88,755.88 4949.88,755.88 ; v1(5002,808) 4949.88,755.88 ; v1(5029,939.57) 5078.43,989 v1(5405,989)
Net*1_6: *1.6 C19.1 | length 498.4
  Top Layer w7: *1.6@1837.87,1111.81 1837.87,1101 1891.37,1101 1925,1067.37 1925,1043.63 1926,1042.63 1959,1042.63 1960,1043.63 1960,1168 2087,1295 C19.1@2110,1295
Net*1_7: *1.7 C18.2 L2.2 | length 1957.7
  Top Layer w7: L2.2@1155,580 1155,600 v1(1211,600) ; v1(1902.37,1282.81) v1@1902.37,1127 ; v1(1904.5,1127) v1@1902.37,1127 ; C18.2@2444.06,1355 v1(2513,1355) ; 1892.44,1126.82 v1@1902.37,1127 ; 1892.44,1126.82 *1.7@1868.19,1126.38 1892,1126.38 1892.44,1126.82 ; 1892.44,1126.82 1892.62,1127 v1@1902.37,1127
  Layer 1 w10: v1(1211,600) 1211,657.78 1290.95,737.73 1348.73,737.73 1425,814 1591.5,814 v1(1904.5,1127) ; v1(1902.37,1282.81) 2440.81,1282.81 v1(2513,1355)
Net*1_8: *1.8 R9.1 | length 1471.8
  Top Layer w7: *1.8@1868.19,1142.13 1887.87,1142.13 v1(1891,1139) ; v1(2455,1269) 2517,1269 2611,1363 2704,1363 2707,1360 2707,1279 2708,1278 2800.5,1278 2815,1292.5 2815,1500 2814,1501 2707.05,1501 2706.05,1500 R9.1@2706.05,1475
  Bottom Layer w7: v1(1891,1139) 2325,1139 v1(2455,1269)
Net*1_9: *1.9 C25.2 R10.2 | length 4026.6
  Top Layer w7: *1.9@1868.19,1157.87 1879.41,1157.87 1883.39,1161.85 1886.82,1161.85 1891.18,1166.21 1891.18,1253.59 1885,1259.76 v1(1885,1260) ; v3(2345.37,1190) 2345.37,1189.76 2360.19,1174.95 2360.19,1145.05 2375,1130.24 v1(2375,1130) ; v3(3509.63,805) 3599.76,805 3604.76,800 v1(3605,800) ; v3(4315,735) 4426.1,735 4521.1,830 v1(4615,830) ; v1(4850,815) 4850.17,814.83 4850.17,806.8 4860,796.97 R10.2@4860,795 v1(4860,826) ; C25.2@5374.41,800 v1(5374.41,826)
  Layer 1 w10: v1(2375,1130) 2480,1130 v4(2614.15,995.85) ; v3(2724.96,914.96) 3220.04,914.96 v4(3320,815) ; v1(3605,800) 3620,785 v4(3655,785) ; v1(4615,830) 4725,830 4740,815 v1(4850,815) ; v1(4860,826) v1(5374.41,826)
  Layer 2 w10: v4(2614.15,995.85) 2623.94,986.06 v3(2638.94,986.06) ; v4(3320,815) 3350,815 3395,860 3420,860 v3(3425,865) ; v4(3655,785) 3665,775 v3(3665,740)
  Bottom Layer w7: v1(1885,1260) 1885.24,1260 1900.17,1245.06 2290.31,1245.06 v3(2345.37,1190) ; v3(2638.94,986.06) 2700,925 2700,924.1 2708.98,915.12 2724.79,915.12 v3(2724.96,914.96) ; v3(3425,865) 3485,805 v3(3509.63,805) ; v3(3665,740) 4309.76,740 4314.76,735 v3(4315,735)
  other v1: 4315,735 3509.63,805 2345.37,1190
  other v3: 1885,1260
  other v4: 4315,735 3509.63,805 2724.96,914.96 2345.37,1190 1885,1260
Net*1_11: *1.11 C17.2 R8.1 | length 1364.8
  Top Layer w7: *1.11@1837.87,1188.19 1837.87,1243.87 v1(1850,1256) ; R8.1@2875.24,1465 2875.24,1367.5 2890.41,1352.32 C17.2@2920,1352.32 v1(2920,1376)
  Layer 1 w10: v1(1850,1256) 1970,1376 v1(2920,1376)
Net*2_1: *2.1 C39.2 R24.1 R25.1 R27.1 | length 4736.7
  Top Layer w7: C39.2@2960,195.01 2960,211 2961,212 v2(3100,212) ; v2(3630,1007) 3680,1057 ; v1(3680,1015.31) 3680,1057 ; *2.1@3680,1095.87 3680,1057 ; v1(5480,1015.31) R25.1@5480,1049.25 5497.25,1049.25 5510,1062 5510,1341.23 5464,1387.23 5422.23,1387.23 5375.47,1340.47 R27.1@5365,1340.47 5349,1340.47 5348,1341.47 5348,1396 5362.5,1410.5 5580.5,1410.5 5629,1362 5629,680.25 5628,679.25 R24.1@5610,679.25
  Layer 2 w10: v2(3100,212) 3630,742 3630,770.58 3627.13,773.45 3627.13,796.55 3630,799.42 v2(3630,1007)
  Bottom Layer w7: v1(3680,1015.31) v1(5480,1015.31)
Net*2_6: *2.6 L4.1 | length 2925.9
  Top Layer w7: L4.1@2025,550 2025,407.5 2208.5,224 2265,224 v1(2275,234) ; *2.6@3780,1354.13 3780,1330 v1(3795,1315)
  Layer 1 w10: v1(2275,234) 2781.65,234 2783.81,231.84 3441.84,231.84 v4(3666,456)
  Layer 2 w10: v4(3666,456) 3666,721.29 3678.94,734.23 3678.94,780.77 3666,793.71 3666,1186 v1(3795,1315)
Net*2_7: *2.7 C45.2 R28.2 | length 2598.8
  Top Layer w7: v2(3182,586.5) 3182,306 3254,234 3254,195 C45.2@3254.29,195 ; v2(3705,1342) 3730,1342 *2.7@3730,1354.13 3730,1394 3750,1414 4102.5,1414 4137,1379.5 4137,1262 4150,1249 4562.5,1249 4580,1231.5 R28.2@4580,1120
  Layer 2 w10: v2(3182,586.5) 3182,626 3402.06,846.06 3425.77,846.06 3524.89,945.18 3524.89,968.89 3624,1068 3624,1261 v2(3705,1342)
Net*3_1: *3.1 C80.2 R61.2 R62.1 | length 2392.3
  Top Layer w7: *3.1@1500,346.73 1500,299 v1(1531,268) ; v1(2413,263) 2420,255.8 v1(2420,250) 2420.42,250 2429.77,251.77 2433.9,255.9 2440,262.1 2440,266.85 R62.1@2440,272.2 ; R62.1@2440,272 2426,272 2425,273 2425,365.5 2439.71,380.21 2525,380.21 C80.2@2525,380 ; v2(3483.5,329) 3530,329 R61.2@3530,327.8
  Layer 1 w10: v1(1531,268) 2192.37,268 2202.19,277.81 2398.19,277.81 v1(2413,263) ; v1(2420,250) 3218,250 3297,329 v2(3483.5,329)
Net*3_2: *3.2 R63.2 | length 1690.1
  Top Layer w7: v1(1550,287) *3.2@1550,346.73 ; R63.2@2405,1050 v1(2405,1082)
  Layer 1 w10: v4(1913,1082) v1(2405,1082)
  Layer 2 w10: v1(1550,287) 1789,287 1847.58,345.58 1855.29,345.58 1863.94,354.23 1863.94,450.35 1844.06,470.23 1844.06,1013.06 v4(1913,1082)
Net*3_6: *3.6 L7.1 | length 2368.7
  Top Layer w7: v1(1575,630) *3.6@1600,605 ; L7.1@3090,1090 v1(3090,1254)
  Layer 2 w10: v1(1575,630) 1575,1228 1623,1276 1939,1276 1972,1309 2698,1309 2753,1254 v1(3090,1254)
Net*3_7: *3.7 C86.2 R64.2 | length 1002.5
  Top Layer w7: C86.2@860,860 842,860 841,859 841,798 842,797 R64.2@980,797 ; R64.2@980,797.8 R64.2@980,797 ; v2(1006,609.56) 1006,788 998,796 980,796 R64.2@980,797 ; v1(1525,580) *3.7@1550,605
  Layer 1 w10: v2(1006,609.56) 1035.56,580 1175.25,580 1183.12,572.12 1517.12,572.12 v1(1525,580)
Net*4_1: *4.1 C101.2 R79.2 R80.1 | length 3333.5
  Top Layer w7: *4.1@2630,1060.87 2630,1020 2696,1019 v1(2697,1039) ; C101.2@3440,360 3440,358 3428,358 3427,357 3427,326 3428,325 3459.5,325 3550,415.5 3550,600 v1(3589,639) ; v1(4040,807) R80.1@4065,807 ; R80.1@4065,809.41 R80.1@4065,807 ; v1(4139,807) R80.1@4065,807 ; R79.2@4705,772.8 v1(4705,789)
  Layer 1 w10: v1(2697,1039) 3362.5,1039 ; v1(3589,639) 3589,808 3575,822 3362.5,822 3349,835.5 3349,1025.5 3362.5,1039 ; v1(4040,807) 3808,1039 3362.5,1039 ; v1(4139,807) 4157,789 v1(4705,789)
Net*4_2: *4.2 R81.2 | length 3466.9
  Top Layer w7: *4.2@2680,1060.87 2680,1101 2681,1102 2744,1102 v2(2746,1100) ; R81.2@5495,1237.8 v1(5495,1254)
  Layer 1 w10: v2(2746,1100) 3404.06,1100 3465,1160.94 5267.06,1160.94 5421,1007 5421,923.5 5398,900.5 5398,898.5 5412.5,884 5475,884 5493,902 5493,1252 v1(5495,1254)
Net*4_6: *4.6 L9.1 | length 1773.1
  Top Layer w7: *4.6@2730,1319.13 2730,1355 2745.97,1370.97 2789.47,1370.97 2803,1384.5 v1(2803,1489) ; v2(4074,1258) 4105,1227 L9.1@4105,1090
  Layer 1 w10: v1(2803,1489) 3443,1489 3674,1258 v2(4074,1258)
Net*4_7: *4.7 C107.2 R82.2 | length 2913.9
  Top Layer w7: v2(2655,1295) 2680,1295 *4.7@2680,1319.13 ; R82.2@4750,687.8 4750,775.67 4731.13,794.55 4731.13,1255.83 v1(4781,1305.71) C107.2@4825,1305.71
  Layer 1 w10: v2(2655,1295) 3289,1295 3342,1242 4717.29,1242 v1(4781,1305.71)
Net*5_1: *5.1 C108.2 R83.2 R84.1 | length 1615.9
  Top Layer w7: C108.2@760,240.02 912.5,240.02 935,217.52 935,175 R84.1@935.59,175 1026,175 1031,170 R83.2@1122.2,170 1132,170 1133,169 1133,157.85 1134,156.85 1343.85,156.85 v2(1360,173) ; v2(1530,951) *5.1@1530,1045.87
  Layer 2 w10: v2(1360,173) 1360,582 1530,752 v2(1530,951)
Net*5_2: *5.2 R85.2 | length 1922.8
  Top Layer w7: R85.2@610,250.59 610,249 595,248 595,176 639,132 v2(1082,132) ; v2(1365,990) 1468,990 1520,938 1558,938 1580,960 *5.2@1580,1045.87
  Layer 2 w10: v2(1082,132) 1082,745 1327,990 v2(1365,990)
Net*5_6: *5.6 L10.1 | length 2011.1
  Top Layer w7: *5.6@1630,1304.13 1630,1263 1631,1262 1691,1262 1692,1261 1692,1087 v2(1742,1037) ; v2(3100,488) L10.1@3100,565
  Bottom Layer w7: v2(1742,1037) 2551,1037 v2(3100,488)
Net*5_7: *5.7 C114.2 R86.2 | length 4368.1
  Top Layer w7: C114.2@1215,1305 1215,1342.5 1231.5,1359 1563.5,1359 1580,1342.5 ; *5.7@1580,1304.13 1580,1342.5 ; v1(1580,1365) 1580,1342.5 ; R86.2@4395,337.8 v3(4395,388)
  Layer 1 w10: v1(1580,1365) 1688,1365 1910,1587 3612.5,1587 3632,1567.5 3632,1403 3650,1385 3980,1385 v2(4087,1278)
  Layer 2 w10: v2(4087,1278) 4087,696 v3(4395,388)
NetC4_2: C4.2 R3.2 U1.3 | length 748.5
  Top Layer w7: R3.2@1925,1015 v1(2001,1015) ; v1(2252,764) 2305.63,764 U1.3@2305.63,770 2306.63,790 2427,790 2505.59,868.59 C4.2@2505.59,875
  Layer 1 w10: v1(2001,1015) v1(2252,764)
NetC5_1: C5.1 R1.1 R2.1 U1.11 U1.12 | length 764.4
  Top Layer w7: v1(2332,680) R1.1@2389.99,610 ; v1(2332,858) 2306.63,858 U1.12@2305.63,880.24 U1.11@2325.32,880.24 2325.32,949.32 2388.43,1012.43 ; C5.1@2388.43,1185 2388.43,1012.43 ; R2.1@2479.17,1005 2389.43,1005 2388.43,1012.43
  Layer 1 w10: v1(2332,680) v1(2332,858)
NetC6_1: C6.1 U1.5 | length 557.4
  Top Layer w7: C6.1@1908.43,800 1908.43,724.57 1925,708 2122,708 2161,747 2344,747 2345,748 U1.5@2345,770
NetC7_1: C7.1 L1.1 U1.7 | length 2431.2
  Top Layer w7: L1.1@935,1100 935,946 v1(984,897) ; v1(1695.47,763) C7.1@1695.47,720 1696,720 v1(1739,763) ; v1(2275,825.12) U1.7@2354.84,825.12
  Layer 1 w10: v1(984,897) 984,581.71 1001.44,564.27 1163.1,564.27 1169.19,558.19 1618.25,558.19 1778,717.94 1903,717.94 1904,718.94 1904,746.5 1887.5,763 ; v1(1695.47,763) v1(1739,763) 1887.5,763 ; v1(2275,825.12) 2275,756.5 2262.5,744 1940,744 1921,763 1887.5,763
NetC7_2: C7.2 R4.1 | length 107.7
  Top Layer w7: C7.2@1754.53,720 1754.53,807.06 1761.05,813.58 R4.1@1761.05,825
NetC8_1: C8.1 U1.6 | length 2127.1
  Top Layer w7: U1.6@2364.69,770 2364.69,721 v2(2393,692.69) ; v2(3930,386) C8.1@3930,760
  Bottom Layer w7: v2(2393,692.69) 2699.69,386 v2(3930,386)
NetC12_1: C12.1 Q1.3 R6.2 | length 1996.7
  Top Layer w7: C12.1@1290,1094.65 1290,1045 1340,995 1340,793 1367,766 1367,643 1430.59,579.41 R6.2@1430.59,530 1430.59,458.59 v1(1374,402) ; v1(2283.88,263.88) 2294.41,274.41 Q1.3@2308.09,274.41
  Layer 1 w10: v1(1374,402) 1284,401 1284,336 1367,253 2216.12,253 2227,263.88 v1(2283.88,263.88)
NetC13_1: C13.1 C65.2 C87.2 Q1.1 Q1.2 Q1.5 Q1.6 Q1.7 Q3.4 Q3.8 U6.4 U8.4 | length 6198.1
  Top Layer w7: v1(439,958) 439,817.5 460.5,796 513,796 514,797 514,810.61 515,811.61 Q3.8@535,811.61 Q3.4@571.91,811.61 ; v1(685,1204) C87.2@685,1235.12 v1(716.12,1235.12) ; v1(1333.15,1185) U8.4@1397.2,1120.94 ; C13.1@2210,729.57 2309,729.57 2310,728.57 2310,355 2308.09,353.09 Q1.1@2308.09,325.59 ; Q1.2@2308.09,300 Q1.1@2308.09,325.59 ; Q1.5@2381.91,300 Q1.6@2381.91,325.59 ; v1(2406,328.94) 2405.83,328.77 2385.09,328.77 Q1.6@2381.91,325.59 ; v1(2815,438) 2815,599 2838,622 2838,789.12 C65.2@2815,790.12 v1(2815,1079) ; v1(2991.45,438) 3015.45,414 ; v1(3015.45,461) 3015.45,414 ; U6.4@3105,324.45 3015.45,414 ; Q1.1@2308.09,325.59 2320,325.59 2332.79,312.8 Q1.7@2345,312.8 2357,312.8 2369.79,325.59 Q1.6@2381.91,325.59
  Layer 1 w10: v1(439,958) v1(685,1204) 685,1185 v1(1333.15,1185) ; v1(716.12,1235.12) 807.37,1326.37 1794.63,1326.37 1816,1305 1816,1233.55 1903.55,1146 2590,1146 2657,1079 v1(2815,1079) ; v1(2406,328.94) 2406,442.5 2424.5,461 v1(3015.45,461) ; v1(2815,438) v1(2991.45,438)
NetC18_1: C18.1 R9.2 | length 618.2
  Top Layer w7: C18.1@2385,1355 2385,1317.5 2399.5,1303 2534,1303 2612.91,1381.91 2781.41,1381.91 2792,1392.5 2792,1458 2775,1475 R9.2@2733.95,1475
NetC29_1: C29.1 U2.8 | length 2531.3
  Top Layer w7: C29.1@1415,740.47 1437.5,740.47 1475,702.97 v1(1475,525) ; U2.8@3660,589.06 v1(3660,628.3)
  Layer 1 w10: v1(1475,525) 2807.75,525 2817.13,534.37 3001.37,534.37 3105,638 3562.06,638 3575,625.06 3594.76,625.06 3598,628.3 v1(3660,628.3)
NetC29_2: C29.2 R14.2 | length 584.9
  Top Layer w7: C29.2@1415,799.53 v1(1458.47,799.53) ; R14.2@1890,650 v1(1890,731.88)
  Layer 1 w10: v1(1458.47,799.53) 1526.12,731.88 v1(1890,731.88)
NetC32_1: C32.1 L3.2 | length 2588.8
  Top Layer w7: C32.1@3285,1320 v1(3337.94,1320) ; v1(5347,886) 5347,773 5385,735 L3.2@5385,565
  Bottom Layer w7: v1(3337.94,1320) 3665.94,992 4535.63,992 4548,1004.37 5228.63,1004.37 v1(5347,886)
NetC32_2: C32.2 R17.2 R20.2 | length 1737.2
  Top Layer w7: R17.2@2110,880 2110,1192 2138,1220 2138,1417.5 2159.45,1438.95 R20.2@2555,1438.95 2574.05,1438.95 v2(2578,1435) ; v1(3166,1377) 3243.17,1377 3259,1392.83 C32.2@3285,1392.83
  Layer 1 w10: v2(2578,1435) 3108,1435 v1(3166,1377)